# Altium PCB PCB1.PcbDoc
Units mm, origin at the board's own origin, x right, y up, seen from the top; angles counter-clockwise.
Board outline 22 x 14 mm, 2 copper layers (Top Layer, Bottom Layer); 10 components, 6 nets, 23 pads, 27 vias.
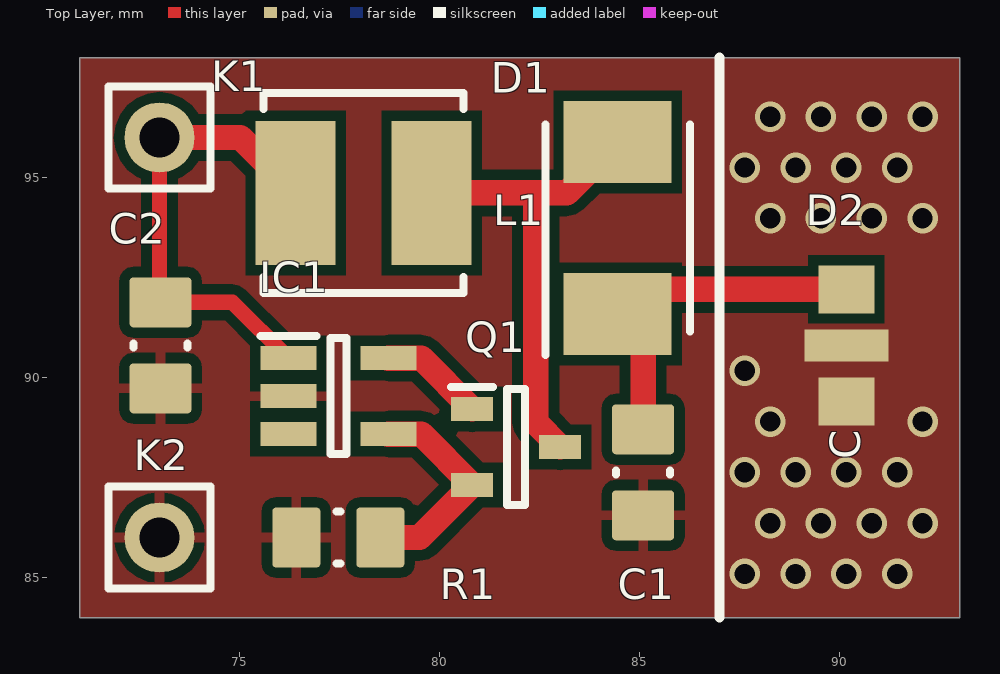
[diagram p0: Top Layer view]
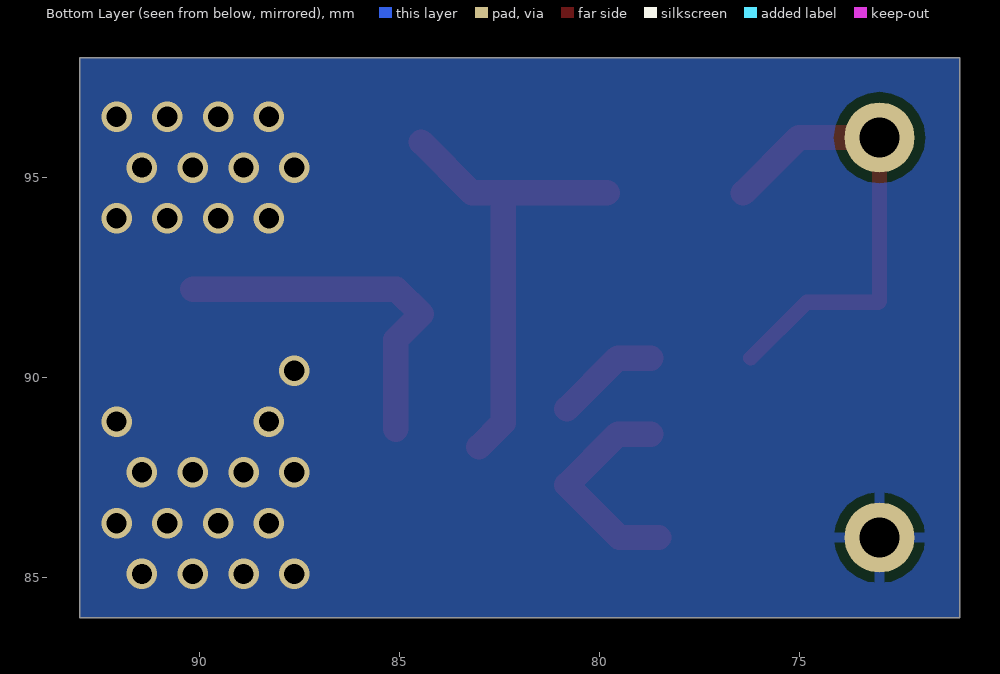
[diagram p1: Bottom Layer view, seen from below]
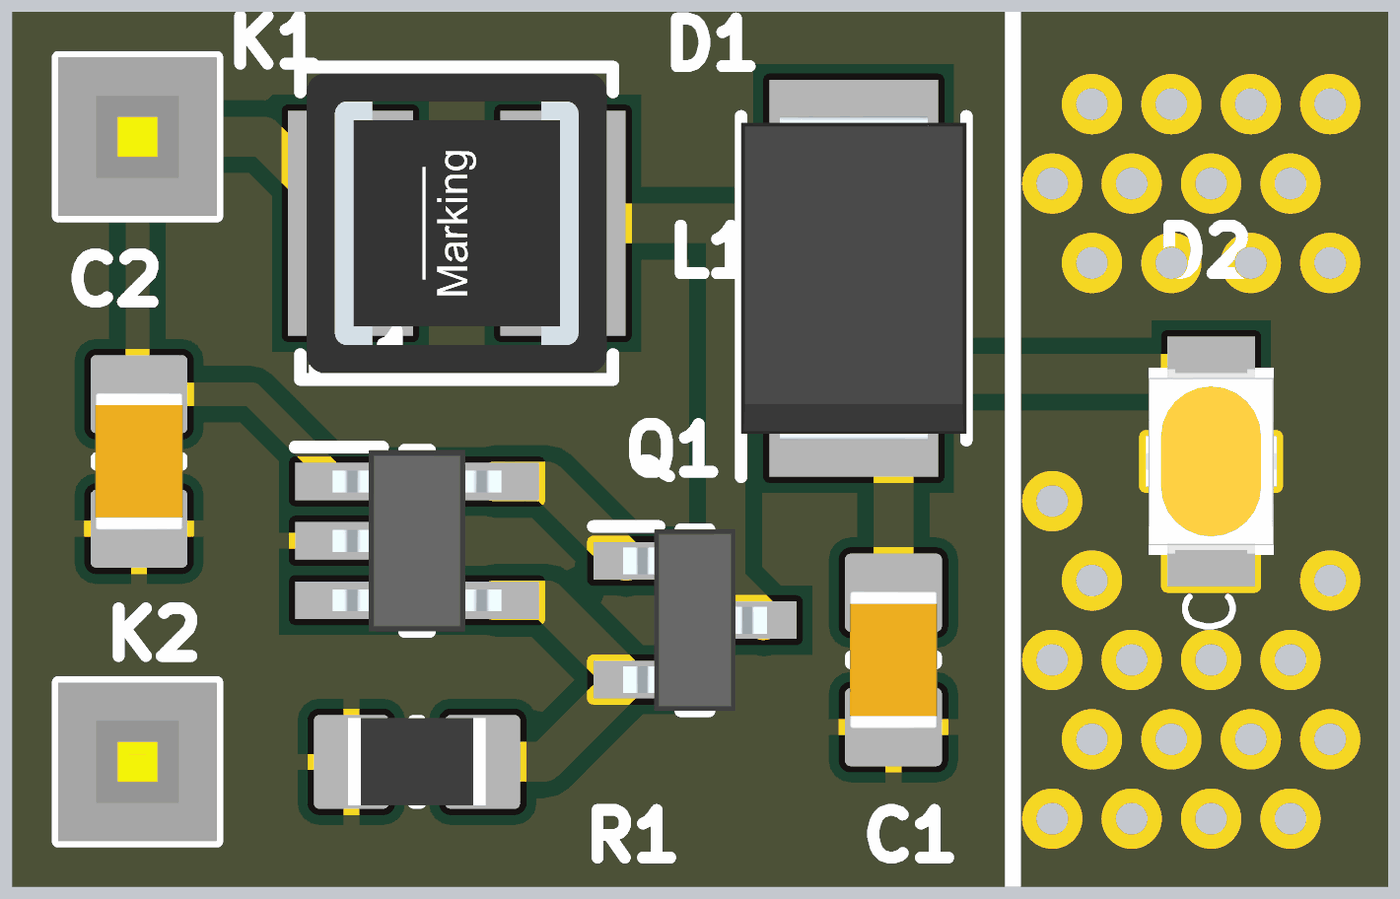
[diagram p2: 3D render of the assembled board from above, using the file's embedded part models]

## Layer stack, top to bottom
Top Solder: solder mask 0.0102, Solder Resist, Dk 3.5
Top Layer: signal copper 0.0356
Dielectric 1: dielectric 0.32, FR-4, Dk 4.8
Bottom Layer: signal copper 0.0356
Bottom Solder: solder mask 0.0102, Solder Resist, Dk 3.5

## Board outline
71,84 93,84 93,98 71,98

## Design rules (kind name [scope] priority, off if disabled: settings)
Clearance [All] p1: gap=0.254 ignorepadtopadclearanceinfootprint=FALSE
PolygonConnect PolygonConnect_1 [HasFootprint('WL-SWTP_3022_L3W2.1H0.8')] p1: connectstyle=Direct reliefconductorwidth=0.254 reliefentries=4 polygonreliefangle="90 Angle" airgapwidth=0.254
PolygonConnect [All] p2: thpad.connectstyle=Relief thpad.reliefconductorwidth=0.254 thpad.reliefentries=4 thpad.polygonreliefangle="90 Angle" thpad.airgapwidth=0.254 smdpad.connectstyle=Relief smdpad.reliefconductorwidth=0.254 smdpad.reliefentries=4 smdpad.polygonreliefangle="90 Angle" smdpad.airgapwidth=0.254 via.connectstyle=Direct via.reliefconductorwidth=0.254 via.reliefentries=4 via.polygonreliefangle="90 Angle" via.airgapwidth=0.254
RoutingVias [All] p1: holewidth=0.711 width=1.27 viastyle="Through Hole" minholewidth=0.711 minwidth=1.27 maxholewidth=0.711 maxwidth=1.27
SolderMaskExpansion [All] p1: expansion=0.102
Width [All] p1: maxlimit=1.27 minlimit=0.254 preferedwidth=0.635 toplayer_minwidth=0.381 bottomlayer_maxwidth=0.254 bottomlayer_prefwidth=0.254 minimp=50.000000 maximp=50.000000 favimp=50.000000
30 further rules are at their usual default settings.

## Components (designator, comment, footprint, x,y, rotation, side; value= is the part's Value field where it differs from the comment)
C1 "2,2 μF" C2012_0805I_M 85.09,87.63 r270 top
C2 "100 nF" C2012_0805I_M 73.025,90.805 r270 top
D1 "SK14B" DIOM5236X261N 84.455,93.735 r90 top
D2 "158302250" WL-SWTP_3022_L3W2.1H0.8 90.17,90.805 r90 top
IC1 "ZXSC300E5TA" SOT95P270X145-5N 77.47,89.535 r0 top
K1 "BAT +" H1x1 73,96 r0 top
K2 "BAT -" H1x1 73,86 r0 top
L1 "100uH, 0.42A" WE-LQFS_4818 78.105,94.615 r90 top
Q1 "PBSS4120T,215" SOT95P230X110-3N 81.915,88.265 r0 top
R1 "0,13 Ω" R2012_0805I_M 77.47,86 r180 top value=R13

## Footprints (in the part's own frame and the unit in brackets; to place one, negate y for a bottom-side part, rotate by r counter-clockwise, add the part's x,y. Pads: shape width x height; smd on the part's side, far side on the other; paste and mask are expansions set on the pad)
C2012_0805I_M [mm] "Chip Capacitor, 2-Leads, Body 2.05x1.25mm, IPC Low Density"
  rrect15% 1.25x1.55 smd: 1(-1.075,0) 2(1.075,0)
  silkscreen extent -0.05,-0.67 0.05,0.67, body extent -1.1,-0.7 1.1,0.7, height 1.4
DIOM5236X261N [mm]
  rect 2.05x2.7 smd: 1(-2.15,0) 2(2.15,0)
  silkscreen extent -3.17,-1.8 2.59,1.8, body extent -2.59,-1.8 2.59,1.8, height 2.61
H1x1 [mm]
  round 1.75 hole 1: 1(0,0)
  silkscreen extent -1.27,-1.27 1.27,1.27, body extent -1.27,-1.27 1.27,1.27, height 8.4
R2012_0805I_M [mm] "Chip Resistor, 2-Leads, Body 2.05x1.25mm, IPC Low Density"
  rrect15% 1.2x1.5 smd: 1(-1.05,0) 2(1.05,0)
  silkscreen extent -0.05,-0.65 0.05,0.65, body extent -1.1,-0.7 1.1,0.7, height 0.8
SOT95P230X110-3N [mm]
  rect 1.05x0.6 smd: 1(-1.1,0.95) 2(-1.1,-0.95) 3(1.1,0)
  silkscreen extent -1.63,-1.45 0.23,1.5, body extent -1.15,-1.45 1.15,1.45, height 1.1
SOT95P270X145-5N [mm]
  rect 1.4x0.6 smd: 1(-1.25,0.95) 2(-1.25,0) 3(-1.25,-0.95) 4(1.25,-0.95) 5(1.25,0.95)
  silkscreen extent -1.95,-1.45 0.2,1.5, body extent -1.35,-1.45 1.35,1.45, height 1.45
WE-LQFS_4818 [mm] "SMT Power Inductor, body 4.8x4.8mm"
  rect 3.6x2 smd: 1(0,1.7) 2(0,-1.7)
  silkscreen extent -2.5,-2.5 2.5,2.5, body extent -2.4,-2.4 2.4,2.4, height 1.8
WL-SWTP_3022_L3W2.1H0.8 [mm] "SMD White Top view PLCC, body 3x2.1mm"
  rect 1.2x1.4 smd: 1(-1.4,0) 2(1.4,0)
  rect 0.8x2.1 smd: 3(0,0)
  body extent -1.5,-1.05 1.5,1.05, height 0.8

## Part data
C1 C2: library part C, "Capacitor"
D1: "Schottky Diode", Manufacturer_Name="Taiwan Semiconductor", Mouser Part Number=821-SK14B, Datasheet Link=http://docs-emea.rs-online.com/webdocs/0897/0900766b8089796b.pdf, Height=2.61mm, Manufacturer_Part_Number=SK14B, Mouser Price/Stock=https://www.mouser.com/Search/Refine.aspx?Keyword=821-SK14B
D2: "WL-SWTP SMT White Top view PLCC, size 3022, Daylight, 3.2V, 120deg", Color Rendering Index typ.=85, Correlated Color Temperature typ.=5000K, Emitting Color=Daylight, Forward Voltage typ.=3.2V, Manufacturer="Wurth Elektronik", Operating Temperature="-40 to +85degC", Chip Technology=InGaN, ComponentLink1Description=Manufacturer, ComponentLink1URL=http://www.we-online.de, ComponentLink2Description=Datasheet, ComponentLink2URL=https://www.we-online.com/catalog/datasheet/158302250.pdf, Luminous Flux typ.=22lm, Manufacturer Part Number=158302250, Mounting Technology=SMT, Packaging="Tape and Reel", Published Date="September 2020", Size=3022, Viewing Angle=120deg
IC1: "Integrated Circuit", Manufacturer_Name="Diodes Inc.", Mouser Part Number=522-ZXSC300E5TA, Arrow Part Number=ZXSC300E5TA, Arrow Price/Stock=https://www.arrow.com/en/products/zxsc300e5ta/diodes-incorporated, Datasheet Link=https://componentsearchengine.com/Datasheets/2/ZXSC300E5TA.pdf, Height=1.45mm, Manufacturer_Part_Number=ZXSC300E5TA, Mouser Price/Stock=https://www.mouser.co.uk/ProductDetail/Diodes-Incorporated/ZXSC300E5TA?qs=OlC7AqGiEDmawYEYAFJ1vw%3D%3D
K1 K2: library part H1x1, "Header 1x1 (male)"
L1: library part 74406042101, "WE-LQFS SMT Power Inductor, size 4818, 100uH, 0.42A", DC Resistance max.=1386mOhm, DC Resistance typ.=1155mOhm, Inductance=100uH, Manufacturer="Wurth Elektronik", Operating Temperature="-40 to +125degC", Rated Current=0.42A, Saturation Current=0.32A, Self Resonant Frequency=15MHz, ComponentLink1Description=Manufacturer, ComponentLink1URL=http://www.we-online.de, ComponentLink2Description=Datasheet, ComponentLink2URL=https://www.we-online.com/catalog/datasheet/74406042101.pdf, Manufacturer Part Number=74406042101, Mounting Technology=SMT, Packaging="Tape and Reel", Published Date="April 2020", Size=4818
Q1: "Transistor BJT NPN", Manufacturer_Name=Nexperia, Mouser Part Number=771-PBSS4120T215, Arrow Part Number=PBSS4120T,215, Arrow Price/Stock=https://www.arrow.com/en/products/pbss4120t215/nexperia, Datasheet Link=http://assets.nexperia.com/documents/data-sheet/PBSS4120T.pdf, Height=1.1mm, Manufacturer_Part_Number=PBSS4120T,215, Mouser Price/Stock=https://www.mouser.co.uk/ProductDetail/Nexperia/PBSS4120T215?qs=LOCUfHb8d9syLy2%252BT0L8uQ%3D%3D
R1: library part R, "R"

## Via types
v1: diameter 0.762, hole 0.508, Top Layer to Bottom Layer, 27 vias

## Nets (pads, with @x,y where several pads share a name; then routed paths per layer and width w, separated by ;. In a path a pad name is that pad's centre, name@x,y a point inside that pad or via, vN(x,y) a via of type N, cw(c..) or ccw(c..) an arc to the next point about the centre after c; other vN are vias at no path point)
GND: C1.2 C2.2 D2.1 D2.3 IC1.2 K2.1 R1.2
  other v1: 87.63,85.09 88.9,85.09 90.17,85.09 91.44,85.09 88.265,86.36 89.535,86.36 90.805,86.36 92.075,86.36 87.63,87.63 88.9,87.63 90.17,87.63 91.44,87.63 88.265,88.9 92.075,88.9 87.63,90.17 88.265,93.98 89.535,93.98 90.805,93.98 92.075,93.98 87.63,95.25 88.9,95.25 90.17,95.25 91.44,95.25 88.265,96.52 89.535,96.52 90.805,96.52 92.075,96.52
NetC1_1: C1.1 D1.1 D2.2 | length 9.1
  Top Layer w0.635: C1.1 85.09,90.95 D1.1 85.075,92.205 D2.2
NetC2_1: C2.1 IC1.1 K1.1 L1.1 | length 11.9
  Top Layer w0.381: K1.1 73,91.905 C2.1 74.825,91.88 IC1.1
  Top Layer w0.635: K1.1 75.02,96 L1.1
NetD1_2: D1.2 L1.2 Q1.3 | length 11.8
  Top Layer w0.635: L1.2 82.55,94.615 ; Q1.3 82.407,88.874 82.407,94.472 82.55,94.615 ; D1.2 83.185,94.615 82.55,94.615
NetIC1_4: IC1.4 Q1.2 R1.1 | length 5.5
  Top Layer w0.635: R1.1 79.5,86 Q1.2 79.545,88.585 IC1.4
NetIC1_5: IC1.5 Q1.1 | length 2.6
  Top Layer w0.635: IC1.5 79.545,90.485 Q1.1
pads on no net: IC1.3

## Polygon pours and split planes (outlines as drawn)
GND on Top Layer "Top Layer-No Net" (solid, pour order 0): 71,84 93,84 93,98 71,98
GND on Bottom Layer "Top Layer-No Net1" (solid, pour order 1): 71,84 93,84 93,98 71,98

## Silkscreen, mask and mechanical layers (free items; w line width, h text height)
Top Overlay:
  lines w0.254: 87,84 87,98
Mechanical 1:
  the board outline again, w0.254
keep-out:
  lines w0.254: 71.5,84.5 92.5,84.5 92.5,97.5 71.5,97.5 71.5,84.5

## Text inside footprints (layer, text, board x,y; h text height)
D2: Top Overlay "C" at 90.52,87.955 h0.76 r90